# Altium PCB PCB1.PcbDoc
Units mil, origin at the board's own origin, x right, y up, seen from the top; angles counter-clockwise.
Board outline 3300 x 3200 mil, 2 copper layers (Top Layer, Bottom Layer); 13 components, 18 nets, 82 pads, 2 vias.
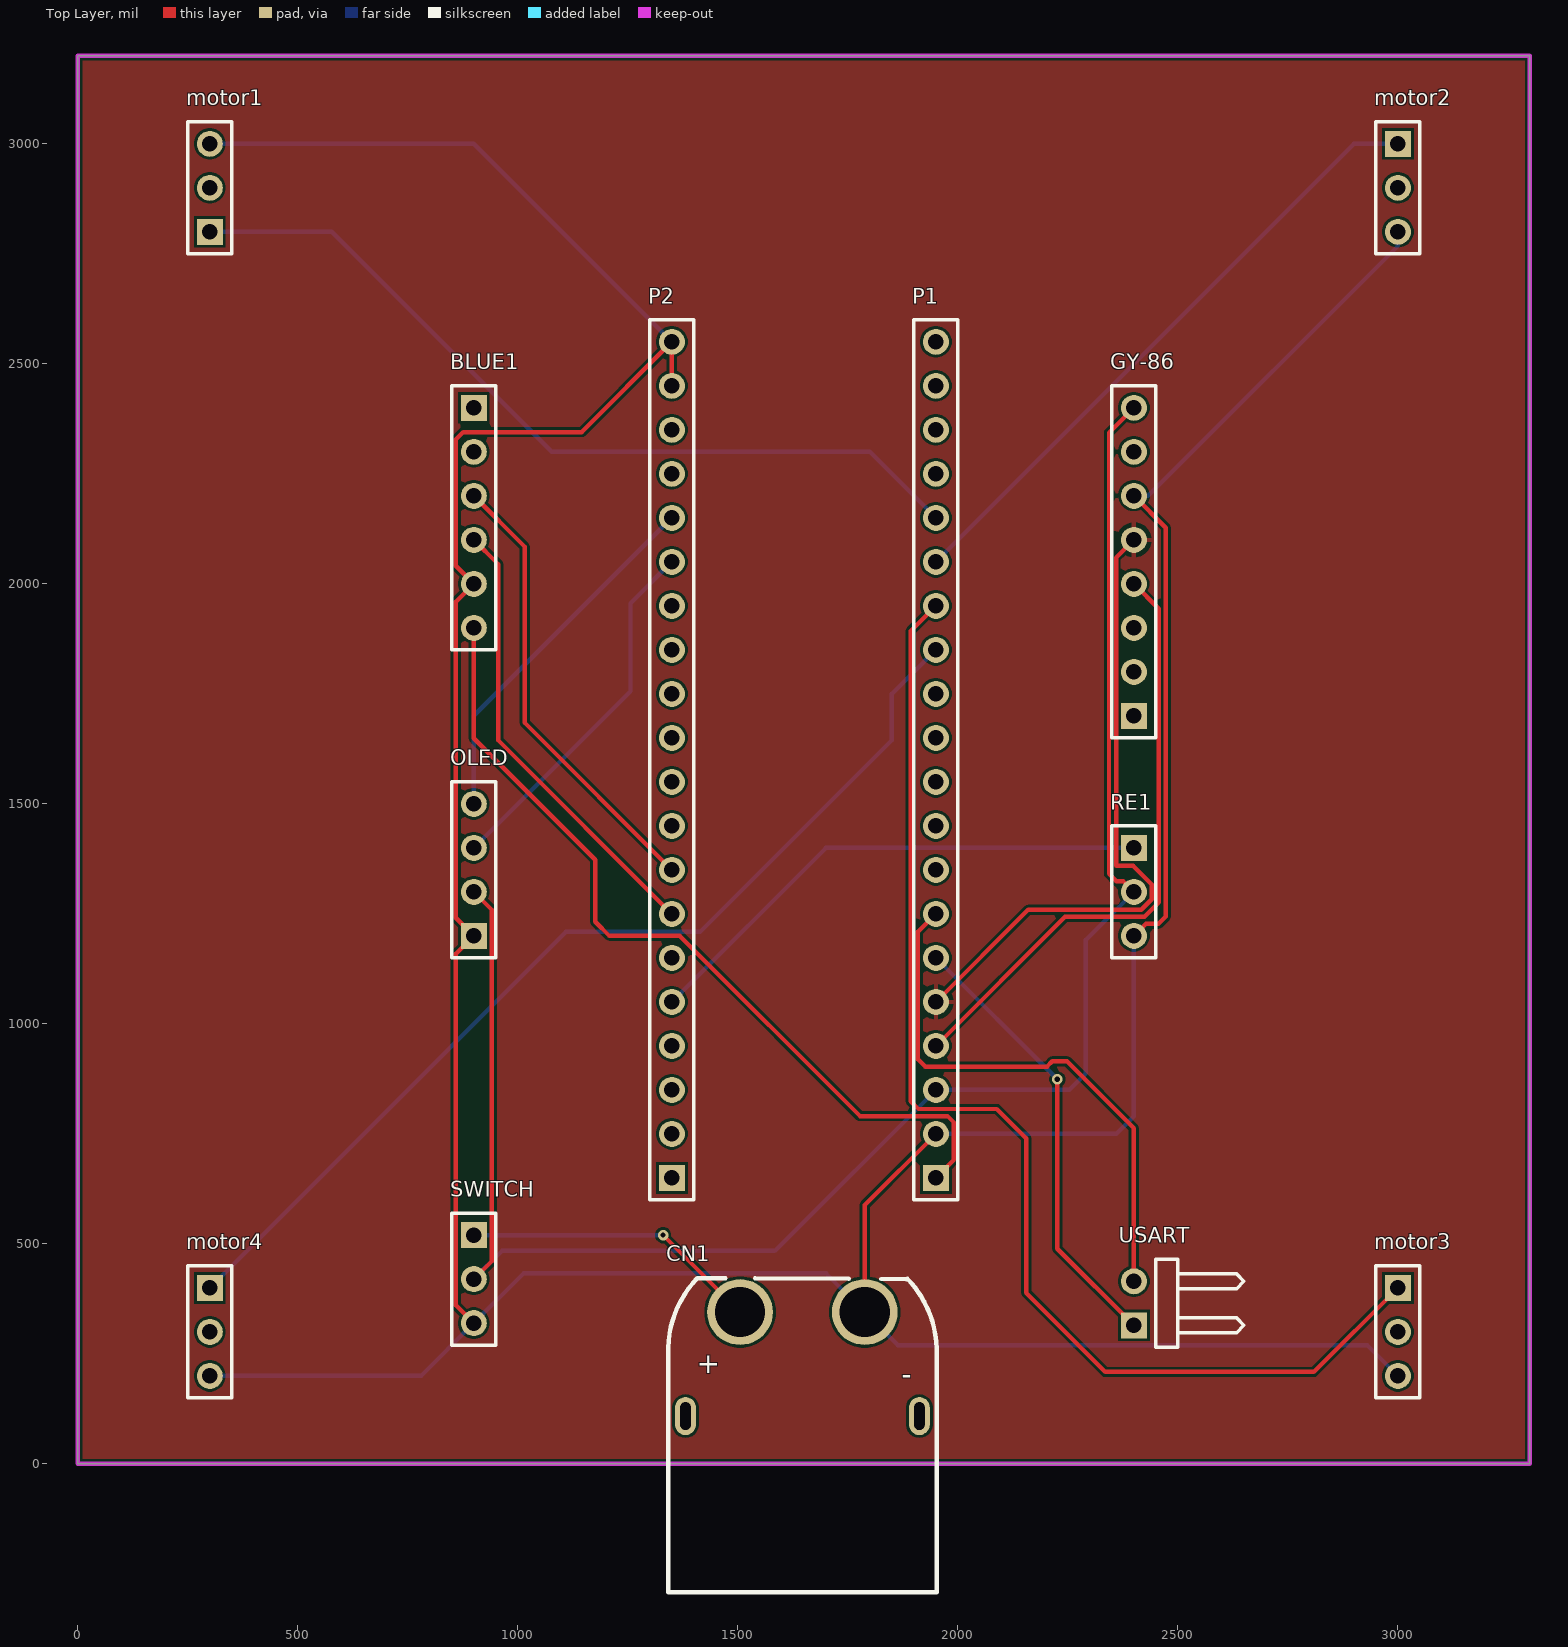
[diagram p0: Top Layer view]
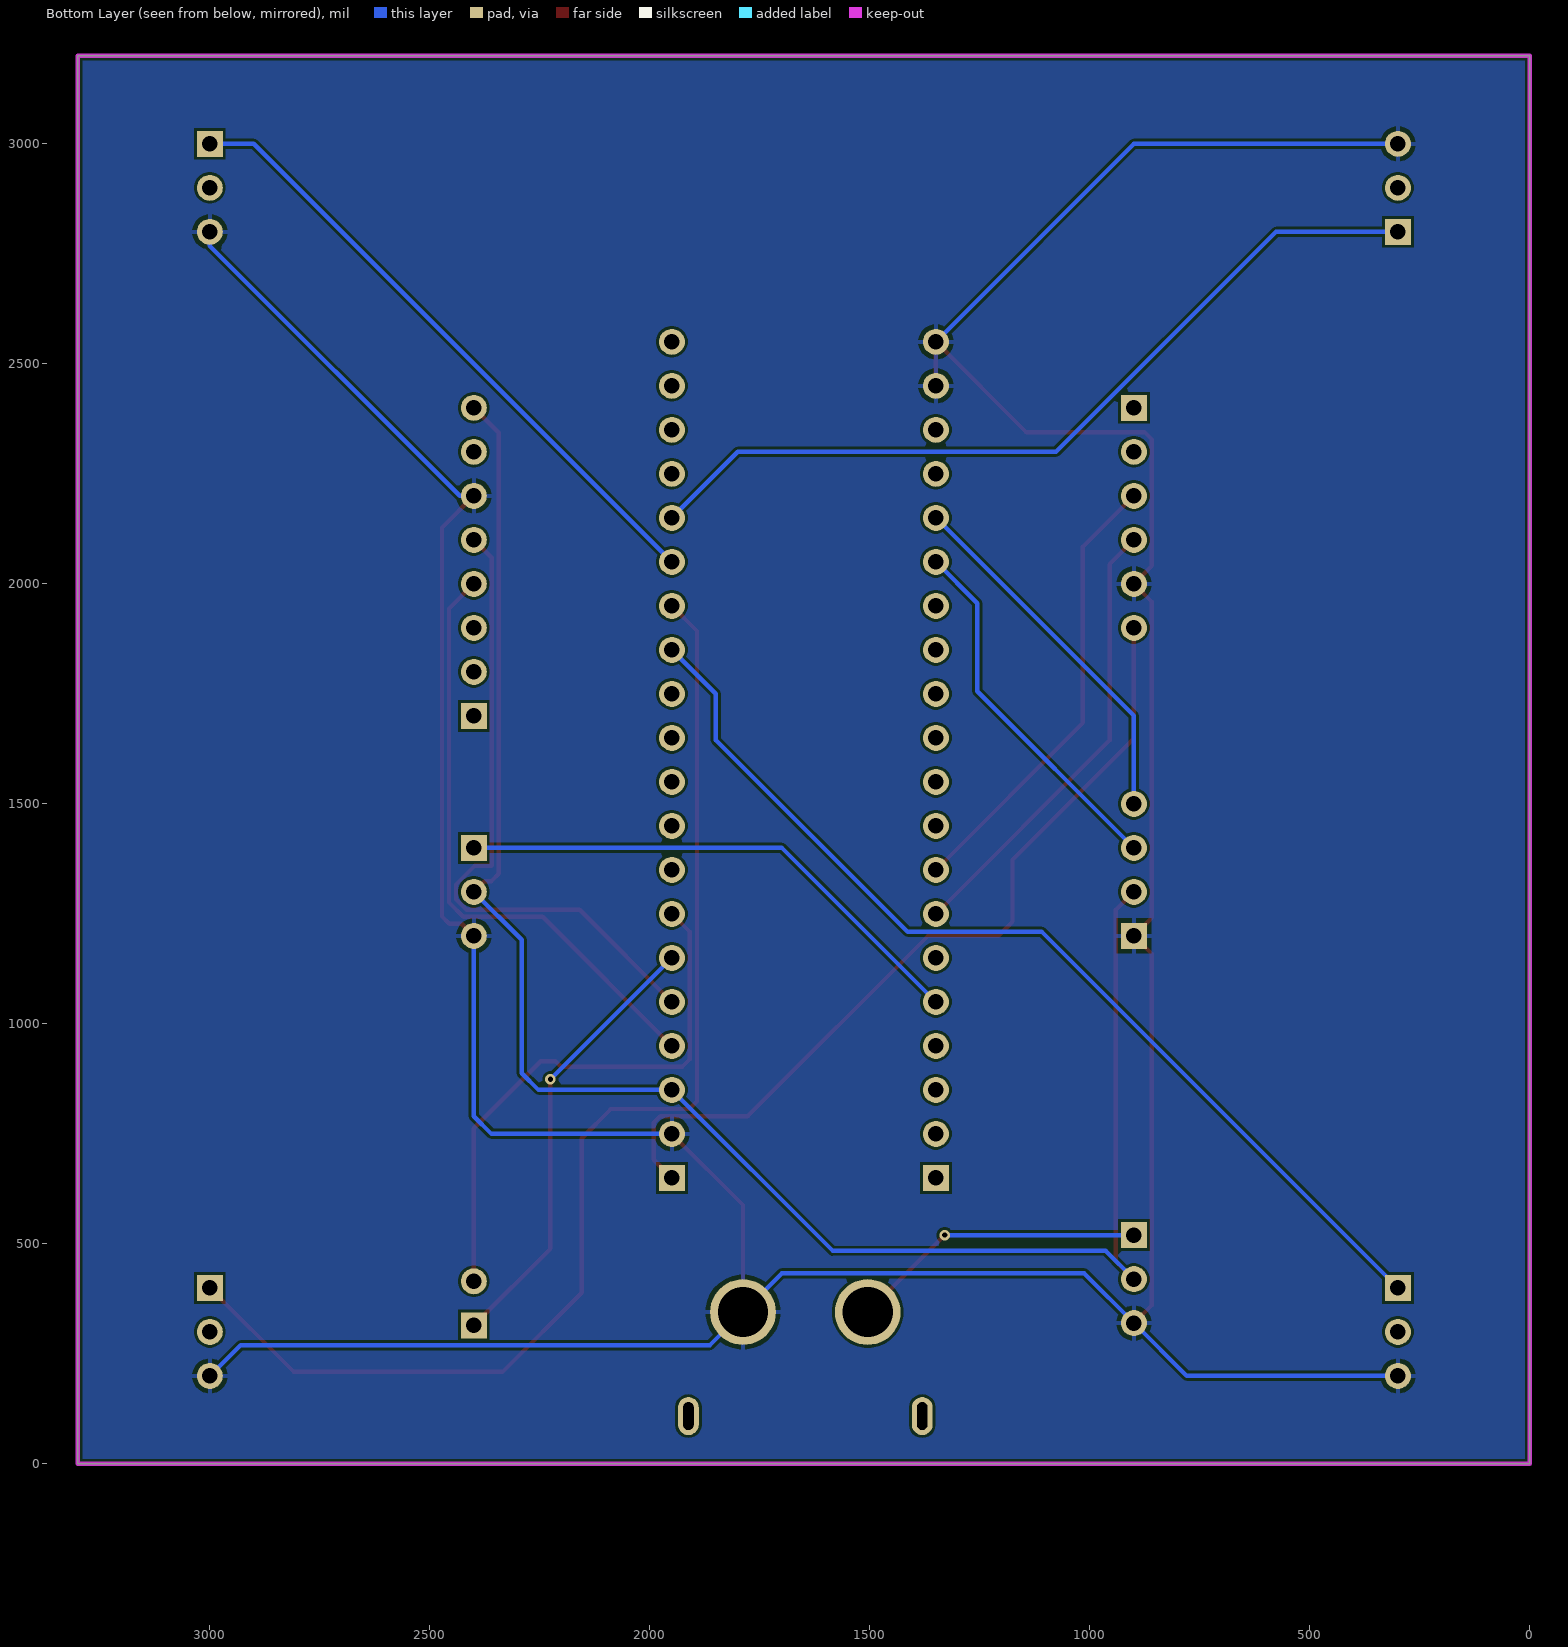
[diagram p1: Bottom Layer view, seen from below]

## Layer stack, top to bottom
Top Solder: solder mask 0.4, Solder Resist, Dk 3.5
Top Layer: signal copper 1.4
Dielectric 1: dielectric 12.6, FR-4, Dk 4.8
Bottom Layer: signal copper 1.4
Bottom Solder: solder mask 0.4, Solder Resist, Dk 3.5

## Board outline
0,0 0,3200 3300,3200 3300,0

## Design rules (kind name [scope] priority, off if disabled: settings)
Clearance [All] p1: gap=6 ignorepadtopadclearanceinfootprint=FALSE
HoleSize [All] p1: absolutevalues=TRUE maxlimit=9999 minlimit=0 maxpercent=80.000 minpercent=20.000
MinimumSolderMaskSliver [All] p1: minsoldermaskwidth=0
PolygonConnect [All] p1: connectstyle=Relief reliefconductorwidth=10 reliefentries=4 polygonreliefangle="90 Angle" airgapwidth=10
RoutingVias [All] p1: holewidth=12 width=24 viastyle="Through Hole" minholewidth=12 minwidth=24 maxholewidth=28 maxwidth=50
SilkToSilkClearance [All] p1: silktosilkclearance=0
SilkToSolderMaskClearance [IsPad] p1: minsilkscreentomaskgap=0 clearancetoexposedcopper=TRUE
SolderMaskExpansion [All] p1: expansion=4 istentingtop=FALSE
SupplyNets "Schematic Supply Nets" [InNet('GND')] p1: voltage=0.000
Width [All] p1: maxlimit=20 minlimit=10 preferedwidth=10
26 further rules are at their usual default settings.

## Components (designator, comment, footprint, x,y, rotation, side; value= is the part's Value field where it differs from the comment)
BLUE1 "bluetooth" HDR1X6 900,2400 r270 top
CN1 "" PCBComponent_1 1724.1,-1421.44 r90 top locked
GY-86 "GY-86" HDR1X8 2400,1700 r90 top
motor1 "motor1" HDR1X3 300,2800 r90 top
motor2 "motor2" HDR1X3 3000,3000 r270 top
motor3 "motor3" HDR1X3 3000,400 r270 top
motor4 "motor4" HDR1X3 300,400 r270 top
OLED "OLED" HDR1X4 900,1200 r90 top
P1 "Header 20_1" HDR1X20 1950,650 r90 top locked
P2 "Header 20_2" HDR1X20 1350,650 r90 top locked
RE1 "receiver" HDR1X3 2400,1400 r270 top
SWITCH "SWITCH" HDR1X3 900,520 r270 top
USART "Header 2H" HDR1X2H 2400,315 r90 top

## Footprints (in the part's own frame and the unit in brackets; to place one, negate y for a bottom-side part, rotate by r counter-clockwise, add the part's x,y. Pads: shape width x height; smd on the part's side, far side on the other; paste and mask are expansions set on the pad)
HDR1X2H [mm] "Connector; Header; 2 Position; Right Angle"
  rect 1.5x1.5 hole 0.9: 1(0,0)
  round 1.5 hole 0.9: 2(2.54,0)
  silkscreen extent -1.27,-6.35 3.81,-1.27
HDR1X3 [mm] "Connector; Header; 3 Position"
  rect 1.5x1.5 hole 0.9: 1(0,0)
  round 1.5 hole 0.9: 2(2.54,0) 3(5.08,0)
  silkscreen extent -1.27,-1.27 6.35,1.27
HDR1X4 [mm] "Connector; Header; 4 Position"
  rect 1.5x1.5 hole 0.9: 1(0,0)
  round 1.5 hole 0.9: 2(2.54,0) 3(5.08,0) 4(7.62,0)
  silkscreen extent -1.27,-1.27 8.89,1.27
HDR1X6 [mm] "Connector; Header; 6 Position"
  rect 1.5x1.5 hole 0.9: 1(0,0)
  round 1.5 hole 0.9: 2(2.54,0) 3(5.08,0) 4(7.62,0) 5(10.16,0) 6(12.7,0)
  silkscreen extent -1.27,-1.27 13.97,1.27
HDR1X8 [mm] "Connector; Header; 8 Position"
  rect 1.5x1.5 hole 0.9: 1(0,0)
  round 1.5 hole 0.9: 2(2.54,0) 3(5.08,0) 4(7.62,0) 5(10.16,0) 6(12.7,0) 7(15.24,0) 8(17.78,0)
  silkscreen extent -1.27,-1.27 19.05,1.27
HDR1X20 [mm] "Connector; Header; 20 Position"
  rect 1.5x1.5 hole 0.9: 1(0,0)
  round 1.5 hole 0.9: 2(2.54,0) 3(5.08,0) 4(7.62,0) 5(10.16,0) 6(12.7,0) 7(15.24,0) 8(17.78,0) 9(20.32,0) 10(22.86,0) 11(25.4,0) 12(27.94,0) 13(30.48,0) 14(33.02,0) 15(35.56,0) 16(38.1,0) 17(40.64,0) 18(43.18,0) 19(45.72,0) 20(48.26,0)
  silkscreen extent -1.27,-1.27 49.53,1.27
PCBComponent_1 [mm]
  round 3.8 hole 2.9 paste-2539.97 mask+0.05: 1(44.868,-1.635) 2(44.868,5.565)
  oval 2.2x1.2 hole 0.6 slot 1.6 at 0 deg paste-2539.97 mask+0.05: 3(38.868,8.715) 4(38.868,-4.785)
  silkscreen extent 28.7,-5.79 46.83,9.71

## Part data
BLUE1: library part "Header 6", "Header, 6-Pin", LatestRevisionDate=17-Jul-2002, LatestRevisionNote="Re-released for DXP Platform.", Publisher="Altium Limited"
CN1: library part Component_1
GY-86: library part "Header 8", "Header, 8-Pin", LatestRevisionDate=17-Jul-2002, LatestRevisionNote="Re-released for DXP Platform.", Publisher="Altium Limited"
motor1 motor2 motor3 motor4 RE1 SWITCH: library part "Header 3", "Header, 3-Pin", LatestRevisionDate=17-Jul-2002, LatestRevisionNote="Re-released for DXP Platform.", Publisher="Altium Limited"
OLED: library part "Header 4", "Header, 4-Pin", LatestRevisionDate=17-Jul-2002, LatestRevisionNote="Re-released for DXP Platform.", Publisher="Altium Limited"
P1 P2: library part "Header1* 20", LatestRevisionDate=17-Jul-2002, LatestRevisionNote="Re-released for DXP Platform.", Publisher="Altium Limited"
USART: "Header, 2-Pin, Right Angle", LatestRevisionDate=17-Jul-2002, LatestRevisionNote="Re-released for DXP Platform.", Publisher="Altium Limited"

## Via types
v1: diameter 24, hole 12, Top Layer to Bottom Layer, 2 vias

## Nets (pads, with @x,y where several pads share a name; then routed paths per layer and width w, separated by ;. In a path a pad name is that pad's centre, name@x,y a point inside that pad or via, vN(x,y) a via of type N, cw(c..) or ccw(c..) an arc to the next point about the centre after c; other vN are vias at no path point)
3V3_1: P2.18
3V3_2: BLUE1.6 P1.1 | length 1929.2
  Top Layer w10: BLUE1.6 900,1649 1176,1373 1176,1232 1208,1200 1368,1200 1777.47,790.53 1976.47,790.53 1991,776 1991,691 P1.1
5V: GY-86.8 OLED.2 P1.3 RE1.2 SWITCH.2 | length 4111.9
  Top Layer w10: SWITCH.2 941,461 941,1259 OLED.2 ; RE1.2 2375.47,1324.53 2360,1324.53 2343.47,1341.06 2343.47,2343.47 GY-86.8
  Bottom Layer w10: SWITCH.2 964,484 1584,484 P1.3 2253,850 2291,888 2291,1191 RE1.2
GND: BLUE1.5 CN1.1 GY-86.6 motor1.3 motor2.3 motor3.3 motor4.3 OLED.1 P1.2 P2.19 P2.20 RE1.3 SWITCH.3 | length 10197.8
  Top Layer w10: SWITCH.3 859,361 859,1159 OLED.1 859,1241 859,1959 BLUE1.5 859,2041 859,2328 876,2345 1145,2345 P2.20 P2.19 ; CN1.1 1788.46,588.46 P1.2 ; RE1.3 2427.47,1227.47 2456,1227.47 2472.53,1244 2472.53,2127.47 GY-86.6
  Bottom Layer w10: motor4.3 780,200 SWITCH.3 1013,433 1700.46,433 CN1.1 1863.46,270 2930,270 motor3.3 ; motor1.3 900,3000 P2.20 ; P1.2 2360,750 2400,790 RE1.3 ; GY-86.6 2432,2200 3000,2768 motor2.3
I2C1_SCL: GY-86.5 P1.5 | length 1477
  Top Layer w10: P1.5 2159.47,1259.47 2416.79,1259.47 2440.53,1283.21 2440.53,1316.79 2398.32,1359 2359.47,1359 2359.47,2059.47 GY-86.5
I2C1_SDA: GY-86.4 P1.4 | length 1389
  Top Layer w10: P1.4 2243.47,1243.47 2424,1243.47 2456.53,1276 2456.53,1943.47 GY-86.4
I2C2_SCL: OLED.3 P2.15 | length 836.4
  Bottom Layer w10: OLED.3 1256,1756 1256,1956 P2.15
I2C2_SDA: OLED.4 P2.16 | length 836.4
  Bottom Layer w10: OLED.4 900,1700 P2.16
P: CN1.2 SWITCH.1 | length 677.5
  Top Layer w10: v1(1330,520) CN1.2
  Bottom Layer w10: SWITCH.1 v1(1330,520)
PA0: P2.5 RE1.1 | length 1195
  Bottom Layer w10: P2.5 1700,1400 RE1.1
TIM1_CH1: motor1.1 P1.16 | length 1919.2
  Bottom Layer w10: motor1.1 577,2800 1077,2300 1800,2300 P1.16
TIM1_CH2: motor2.1 P1.15 | length 1443.5
  Bottom Layer w10: P1.15 2900,3000 motor2.1
TIM1_CH3: motor3.1 P1.14 | length 2796.1
  Top Layer w10: P1.14 1893,1893 1893,824 1910.47,806.53 2088.47,806.53 2155,740 2155,389 2335,209 2809,209 motor3.1
TIM1_CH4: motor4.1 P1.13 | length 2312.1
  Bottom Layer w10: motor4.1 1109,1209 1414,1209 1850,1645 1850,1750 P1.13
USART1_RX: P1.6 USART.1 | length 1021.4
  Top Layer w10: v1(2226,874) 2226,489 USART.1
  Bottom Layer w10: P1.6 v1(2226,874)
USART1_TX: P1.7 USART.2 | length 1260.7
  Top Layer w10: P1.7 1909,1209 1909,920 1926,903 2202.78,903 2214.62,914.84 2248,914.84 2400,762.84 USART.2
USART2_RX: BLUE1.3 P2.8 | length 1036.4
  Top Layer w10: BLUE1.3 1016,2084 1016,1684 P2.8
USART2_TX: BLUE1.4 P2.7 | length 1036.4
  Top Layer w10: BLUE1.4 955,2045 955,1645 P2.7
pads on no net: BLUE1.1 BLUE1.2 CN1.3 CN1.4 GY-86.1 GY-86.2 GY-86.3 GY-86.7 motor1.2 motor2.2 motor3.2 motor4.2 P1.8 P1.9 P1.10 P1.11 P1.12 P1.17 P1.18 P1.19 P1.20 P2.1 P2.2 P2.3 P2.4 P2.6 P2.9 P2.10 P2.11 P2.12 P2.13 P2.14 P2.17

## Polygon pours and split planes (outlines as drawn)
GND on Bottom Layer "GND_L02_P001" (solid, remove dead copper, pour order 1): 0,3200 3300,3200 3300,0 0,0
I2C1_SCL on Top Layer "I2C1_SCL_L01_P000" (solid, remove dead copper, pour order 0): 0,3200 3300,3200 3300,0 0,0

## Keep-outs
Keep-Out Layer:
  the board outline again, w10

## Text inside footprints (layer, text, board x,y; h text height)
CN1: Top Overlay "-" at 1894.73,232.18 h80 r180; Top Overlay "+" at 1459.7,261.7 h80 r180